# EAGLE board nand_synth_v1-1 (EAGLE 5.10)
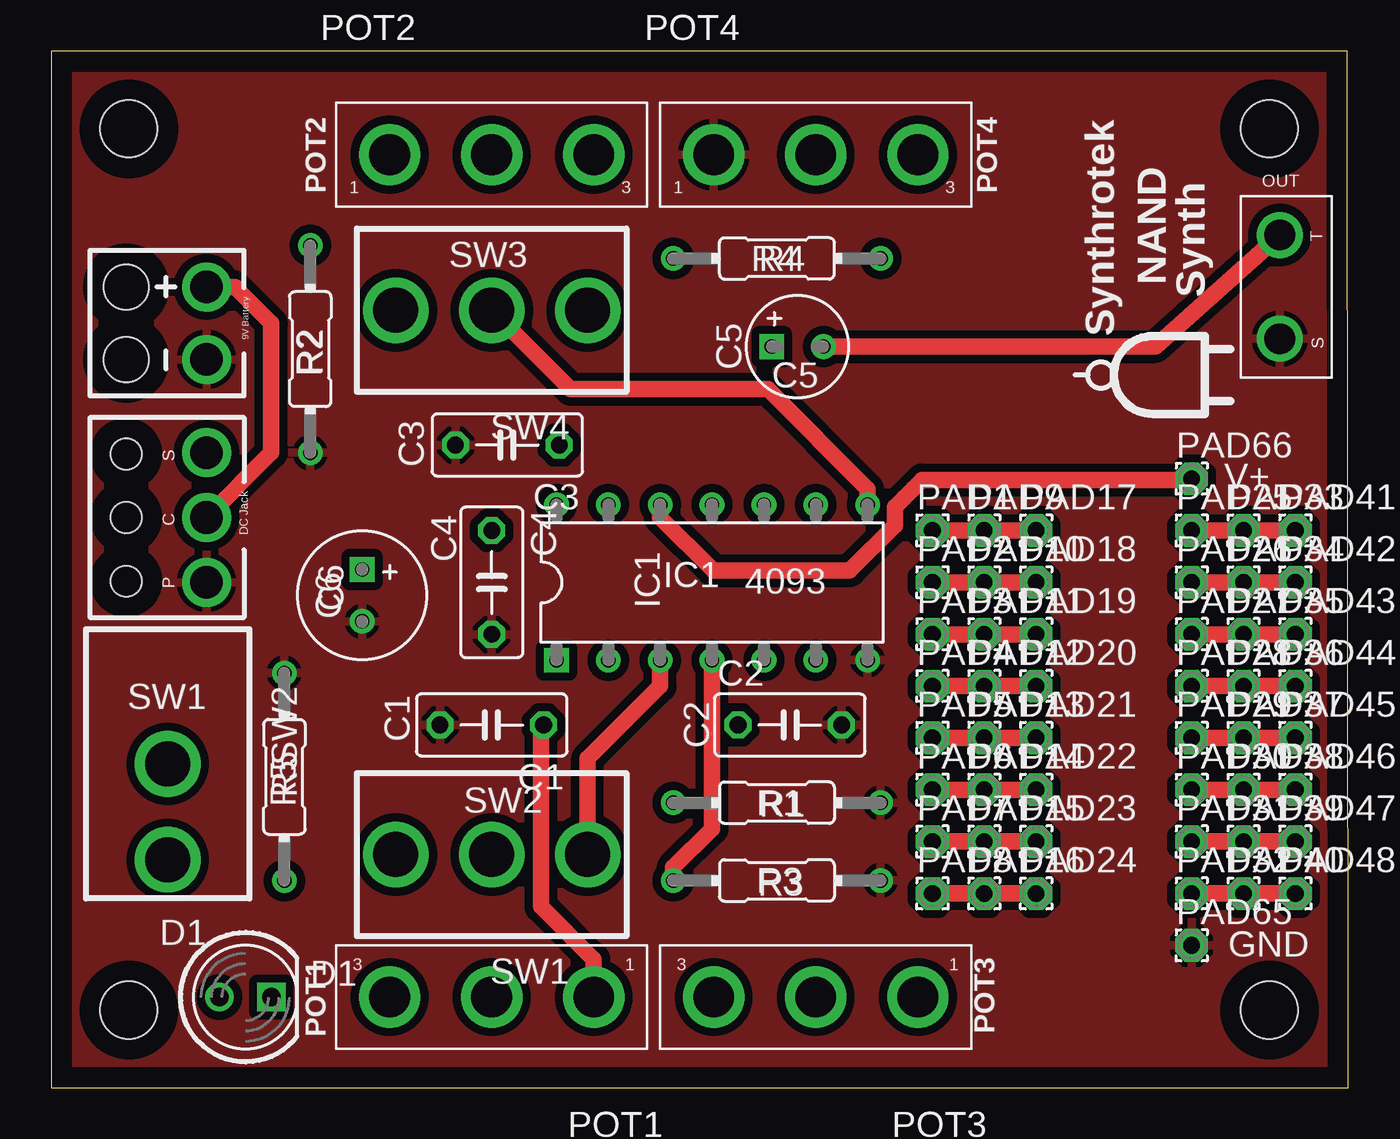
[diagram p0: board, top side]
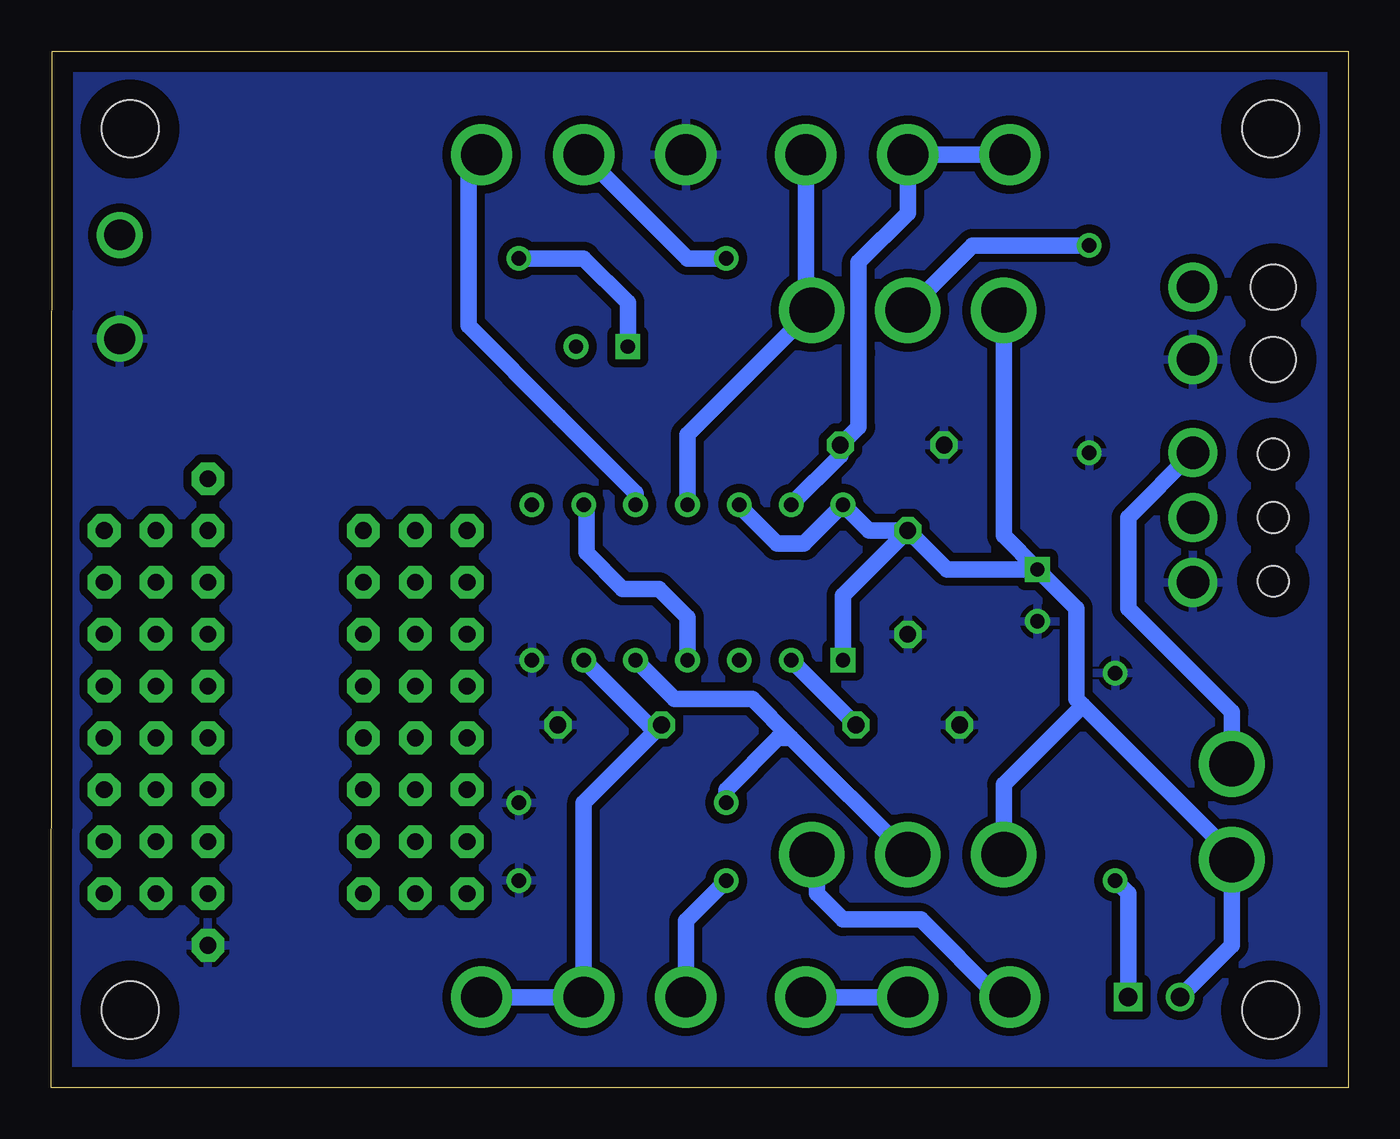
[diagram p1: board, bottom side, seen from below]

Size 63.56 x 50.8 mm. Coordinates in mm from the lower left corner, seen from the top.
Outline: 0,0 63.56,0 63.5,50.8 0,50.8 0,0
Copper layers (1*16): Top 0.035mm / dielectric 1.5mm / Bottom 0.035mm
Design rules "default": minimum track width 10mil, minimum drill 24mil, track to track 8mil, track to pad 8mil, pad to pad 8mil, via to via 8mil, smd to smd 8mil, copper to edge 40mil, drill to drill 8mil, minimum pad ring 10mil, minimum via ring 8mil, stop-mask expansion 4mil, vias tented up to drill 0mil, thermal gap 10mil
Holes 2.8 mm at 3.81,46.99 59.69,46.99 59.69,3.81 3.81,3.81

## Footprints (pad centres in the part's own frame; a part is rotated, then mirrored left to right if it is on the bottom)
C050-030X075 = drill 0.813 octagon: 1 -2.54,0; 2 2.54,0
050_020_1 = drill 0.7 square: + -1.27,0 | drill 0.7 round: - 1.27,0
063_025 = drill 0.7 square: + -1.27,0 | drill 0.7 round: - 1.27,0
LED5MM = drill 0.9 round: A -1.27,0 | drill 0.9 square: K 1.27,0
DIL14 = drill 0.7 square: 1 -7.62,-3.81 | drill 0.7 round: 2 -5.08,-3.81; 3 -2.54,-3.81; 4 0,-3.81; 5 2.54,-3.81; 6 5.08,-3.81; 7 7.62,-3.81; 8 7.62,3.81; 9 5.08,3.81; 10 2.54,3.81; 11 0,3.81; 12 -2.54,3.81; 13 -5.08,3.81; 14 -7.62,3.81
MONO_JACK = drill 1.5 round: SLEEVE 2.54,0; TIP -2.54,0
1,6/0,8 = drill 0.813 pad 1.6 octagon: 1 0,0
POT = drill 2 round: 1 -5,0; 2 0,0; 3 5,0
R0207/4 = drill 0.7 round: 1 -5.08,0; 2 5.08,0
SPDT_TOGGLE_SWITCH = drill 2.2 round: A -4.7,0; B 4.7,0; C 0,0
SPST_TOGGLE_SWITCH = drill 2.2 round: A 0,0; B 4.7,0
9V_BATTERY = drill 1.6 round: 9V_BATTERY_+ -1.778,1.27; 9V_BATTERY_- 1.778,1.27 | hole 2.2: -1.778,-2.667; 1.778,-2.667
DC_JACK_OFFBOARD = drill 1.6 round: CONNECT 0,1.27; PIN 3.175,1.27; SLEEVE -3.175,1.27 | hole 1.5: -3.111,-2.667; 0,-2.667; 3.111,-2.667

## Placement (x,y rotation side)
C1  0.1uF  [C050-030X075]  21.59,17.78 180 top
C2  0.1uF  [C050-030X075]  36.2,17.78 0 top
C3  0.1uF  [C050-030X075]  22.35,31.5 180 top
C4  0.1uF  [C050-030X075]  21.59,24.77 270 top
C5  2.2uF  [050_020_1]  36.58,36.32 0 top
C6  100uF  [063_025]  15.24,24.13 270 top
D1  LED5MM  [LED5MM]  9.53,4.45 0 top
IC1  4093  [DIL14]  32.38,24.77 0 top
OUT  MONO_JACK  [MONO_JACK]  60.2,39.24 270 top
PAD1  [1,6/0,8]  43.18,27.3 0 top
PAD2  [1,6/0,8]  43.18,24.77 0 top
PAD3  [1,6/0,8]  43.18,22.23 0 top
PAD4  [1,6/0,8]  43.18,19.68 0 top
PAD5  [1,6/0,8]  43.18,17.14 0 top
PAD6  [1,6/0,8]  43.18,14.61 0 top
PAD7  [1,6/0,8]  43.18,12.06 0 top
PAD8  [1,6/0,8]  43.18,9.53 0 top
PAD9  [1,6/0,8]  45.72,27.3 0 top
PAD10  [1,6/0,8]  45.72,24.77 0 top
PAD11  [1,6/0,8]  45.72,22.23 0 top
PAD12  [1,6/0,8]  45.72,19.68 0 top
PAD13  [1,6/0,8]  45.72,17.14 0 top
PAD14  [1,6/0,8]  45.72,14.61 0 top
PAD15  [1,6/0,8]  45.72,12.06 0 top
PAD16  [1,6/0,8]  45.72,9.53 0 top
PAD17  [1,6/0,8]  48.26,27.3 0 top
PAD18  [1,6/0,8]  48.26,24.77 0 top
PAD19  [1,6/0,8]  48.26,22.23 0 top
PAD20  [1,6/0,8]  48.26,19.68 0 top
PAD21  [1,6/0,8]  48.26,17.14 0 top
PAD22  [1,6/0,8]  48.26,14.61 0 top
PAD23  [1,6/0,8]  48.26,12.06 0 top
PAD24  [1,6/0,8]  48.26,9.53 0 top
PAD25  [1,6/0,8]  55.88,27.3 0 top
PAD26  [1,6/0,8]  55.88,24.77 0 top
PAD27  [1,6/0,8]  55.88,22.23 0 top
PAD28  [1,6/0,8]  55.88,19.68 0 top
PAD29  [1,6/0,8]  55.88,17.14 0 top
PAD30  [1,6/0,8]  55.88,14.61 0 top
PAD31  [1,6/0,8]  55.88,12.06 0 top
PAD32  [1,6/0,8]  55.88,9.53 0 top
PAD33  [1,6/0,8]  58.42,27.3 0 top
PAD34  [1,6/0,8]  58.42,24.77 0 top
PAD35  [1,6/0,8]  58.42,22.23 0 top
PAD36  [1,6/0,8]  58.42,19.68 0 top
PAD37  [1,6/0,8]  58.42,17.14 0 top
PAD38  [1,6/0,8]  58.42,14.61 0 top
PAD39  [1,6/0,8]  58.42,12.06 0 top
PAD40  [1,6/0,8]  58.42,9.53 0 top
PAD41  [1,6/0,8]  60.96,27.3 0 top
PAD42  [1,6/0,8]  60.96,24.77 0 top
PAD43  [1,6/0,8]  60.96,22.23 0 top
PAD44  [1,6/0,8]  60.96,19.68 0 top
PAD45  [1,6/0,8]  60.96,17.14 0 top
PAD46  [1,6/0,8]  60.96,14.61 0 top
PAD47  [1,6/0,8]  60.96,12.06 0 top
PAD48  [1,6/0,8]  60.96,9.53 0 top
PAD65  [1,6/0,8]  55.88,6.99 0 top
PAD66  [1,6/0,8]  55.88,29.84 0 top
POT1  1M  [POT]  21.59,4.45 180 top
POT2  1M  [POT]  21.59,45.72 0 top
POT3  100k  [POT]  37.47,4.45 180 top
POT4  100kA  [POT]  37.47,45.72 0 top
R1  100k  [R0207/4]  35.56,13.97 180 top
R2  100k  [R0207/4]  12.7,36.2 90 top
R3  100k  [R0207/4]  35.56,10.16 180 top
R4  100k  [R0207/4]  35.56,40.64 0 top
R5  1k  [R0207/4]  11.43,15.24 270 top
SW1  SPDT_SWITCH  [SPDT_TOGGLE_SWITCH]  21.59,11.43 180 top
SW2  SPST_SWITCH  [SPST_TOGGLE_SWITCH]  5.71,15.88 270 top
SW4  SPDT_SWITCH  [SPDT_TOGGLE_SWITCH]  21.59,38.1 180 top
U$1  9V_BATTERY_CLIP  [9V_BATTERY]  6.35,37.47 270 top
U$2  DC_JACK_OFFBOARD  [DC_JACK_OFFBOARD]  6.35,27.94 270 top

## Library data of the parts
C1-C4 = resistor
C5 C6 = gm-caps-electro-pol
D1 = gm-diodes
IC1 = gm-ics
OUT POT1-POT4 SW1 SW2 SW4 U$1 U$2 = 00_steve
PAD1-PAD48 PAD65 PAD66 = wirepad
R1-R5 = gm-resistors

## Nets
+9V: C4.1 C6.+ D1.A IC1.1 IC1.12 IC1.14 PAD66.1 SW1.B SW2.B SW4.B
GND: C1.2 C2.2 C3.2 C4.2 C6.- IC1.7 OUT.SLEEVE PAD65.1 POT4.1 R1.1 R2.1 R3.1 R5.1 U$1.9V_BATTERY_- U$2.PIN
N$1: C1.1 IC1.2 POT1.1 POT1.2
N$2: SW2.A U$2.SLEEVE
N$3: IC1.3 POT1.3 SW1.A
N$4: IC1.8 R2.2 SW4.C
N$5: IC1.5 R1.2 SW1.C
N$6: IC1.4 IC1.9 POT3.3 R3.2
N$7: IC1.10 POT4.3
N$8: U$1.9V_BATTERY_+ U$2.CONNECT
N$9: POT4.2 R4.1
N$10: C5.+ R4.2
N$11: IC1.11 POT2.3 SW4.A
N$12: C5.- OUT.TIP
N$13: D1.K R5.2
N$14: C3.1 IC1.13 POT2.1 POT2.2
N$15: PAD1.1 PAD9.1 PAD17.1
N$16: PAD2.1 PAD10.1 PAD18.1
N$17: PAD3.1 PAD11.1 PAD19.1
N$18: PAD4.1 PAD12.1 PAD20.1
N$19: PAD5.1 PAD13.1 PAD21.1
N$20: PAD6.1 PAD14.1 PAD22.1
N$21: PAD7.1 PAD15.1 PAD23.1
N$22: PAD8.1 PAD16.1 PAD24.1
N$23: PAD32.1 PAD40.1 PAD48.1
N$24: PAD31.1 PAD39.1 PAD47.1
N$25: PAD30.1 PAD38.1 PAD46.1
N$26: PAD29.1 PAD37.1 PAD45.1
N$27: PAD28.1 PAD36.1 PAD44.1
N$28: PAD27.1 PAD35.1 PAD43.1
N$29: PAD26.1 PAD34.1 PAD42.1
N$30: PAD25.1 PAD33.1 PAD41.1
R4: C2.1 IC1.6 POT3.1 POT3.2

## Tracks (layer width: path | path; a pad name or v marks a point on that pad's centre or on a via)
+9V
  Top 0.813: IC1.12 29.84,27.94 32.45,25.34 39.12,25.34 41.34,27.56 41.34,28.45 41.78,28.89 42.23,29.34 42.67,29.78 55.82,29.78 PAD66.1
  Bottom 0.813: D1.A 5.71,6.99 SW2.B 5.71,11.43 13.02,18.73 | 13.02,18.73 13.34,19.05 13.34,23.5 C6.+ | C6.+ 19.68,25.4 C4.1 | C4.1 23.5,27.3 IC1.14 26.67,26.67 28,26.67 29.84,28.51 IC1.12 | C4.1 24.77,24.13 IC1.1 | SW1.B 16.89,14.86 13.02,18.73 | SW4.B 16.89,27.05 C6.+
GND
  pour Bottom (isolate 0.406): 0,50.8 63.5,50.8 63.5,0 0,0
  pour Top (isolate 0.406): 0,50.8 63.5,50.8 63.5,0 0,0
N$1
  Top 0.813: POT1.1 26.59,6.3 24,8.89 24,17.65 C1.1
  Bottom 0.813: POT1.2 POT1.1 | C1.1 IC1.2
N$2
  Bottom 0.813: SW2.A 5.71,18.41 10.79,23.5 10.79,27.94 U$2.SLEEVE
N$3
  Top 0.813: SW1.A 26.29,16.13 29.84,19.68 IC1.3
  Bottom 0.813: POT1.3 17.14,4.45 20.95,8.26 24.77,8.26 26.04,9.53 26.04,11.18 SW1.A
N$4
  Top 0.813: IC1.8 40.01,29.34 35.12,34.23 25.46,34.23 SW4.C
  Bottom 0.813: R2.2 18.41,41.27 SW4.C
N$5
  Bottom 0.813: IC1.5 33.02,19.05 29.21,19.05 27.3,17.14 | SW1.C 27.3,17.14 | R1.2 30.48,14.61 27.94,17.14 27.3,17.14
N$6
  Top 0.813: R3.2 30.48,10.79 32.38,12.7 IC1.4
  Bottom 0.813: POT3.3 32.47,8.18 R3.2 | IC1.4 32.38,23.05 33.78,24.45 35.56,24.45 37.34,26.23 37.34,28.45 IC1.9
N$7
  Bottom 0.813: IC1.10 34.92,29.15 38.67,32.89 43.12,37.34 43.12,45.07 POT4.3
N$8
  Top 0.813: U$1.9V_BATTERY_+ 9.02,39.24 10.79,37.47 10.79,31.11 U$2.CONNECT
N$9
  Bottom 0.813: R4.1 32.38,40.64 POT4.2
N$10
  Bottom 0.813: C5.+ 35.31,38.48 37.47,40.64 R4.2
N$11
  Bottom 0.813: POT2.3 26.59,38.4 SW4.A 32.38,32.01 IC1.11
N$12
  Top 0.813: C5.- 54.1,36.32 OUT.TIP
N$13
  Bottom 0.813: D1.K 10.79,9.53 R5.2
N$14
  Bottom 0.813: POT2.1 POT2.2 21.59,42.86 24,40.45 24,36.01 24,32.38 C3.1 24.89,30.99 IC1.13
N$15
  Top 0.813: PAD17.1 PAD9.1 PAD1.1
N$16
  Top 0.813: PAD2.1 PAD10.1 PAD18.1
N$17
  Top 0.813: PAD3.1 PAD11.1 PAD19.1
N$18
  Top 0.813: PAD20.1 PAD12.1 PAD4.1
N$19
  Top 0.813: PAD5.1 PAD13.1 PAD21.1
N$20
  Top 0.813: PAD22.1 PAD14.1 PAD6.1
N$21
  Top 0.813: PAD23.1 PAD15.1 PAD7.1
N$22
  Top 0.813: PAD8.1 PAD16.1 | PAD16.1 PAD24.1 PAD16.1
N$23
  Top 0.813: PAD32.1 PAD40.1 PAD48.1
N$24
  Top 0.813: PAD47.1 PAD39.1 PAD31.1
N$25
  Top 0.813: PAD30.1 PAD38.1 PAD46.1
N$26
  Top 0.813: PAD45.1 PAD37.1 PAD29.1
N$27
  Top 0.813: PAD44.1 PAD36.1 PAD28.1
N$28
  Top 0.813: PAD27.1 PAD35.1 PAD43.1
N$29
  Top 0.813: PAD42.1 PAD34.1 PAD26.1
N$30
  Top 0.813: PAD25.1 PAD33.1 PAD41.1
R4
  Bottom 0.813: POT3.1 POT3.2 37.47,13.97 C2.1 34.29,17.78 IC1.6

## Text on the board
tPlace: POT2 | POT4 | SW3 | R4 | NAND | Synth | Synthrotek | R2 | C5 | C3 | V+ | C4 | C6 | 4093 | IC1 | SW1 | C1 | C2 | R1 | R5 | SW2 | R3 | D1 | POT1 | GND | POT3